# Altium PCB 驱动1.PcbDoc (part 1 of 2)
Units mil, origin at the board's own origin, x right, y up, seen from the top; angles counter-clockwise.
Board outline 2623.25 x 1935.03 mil, 2 copper layers (Top Layer, Bottom Layer); 38 components, 27 nets, 123 pads, 99 vias.
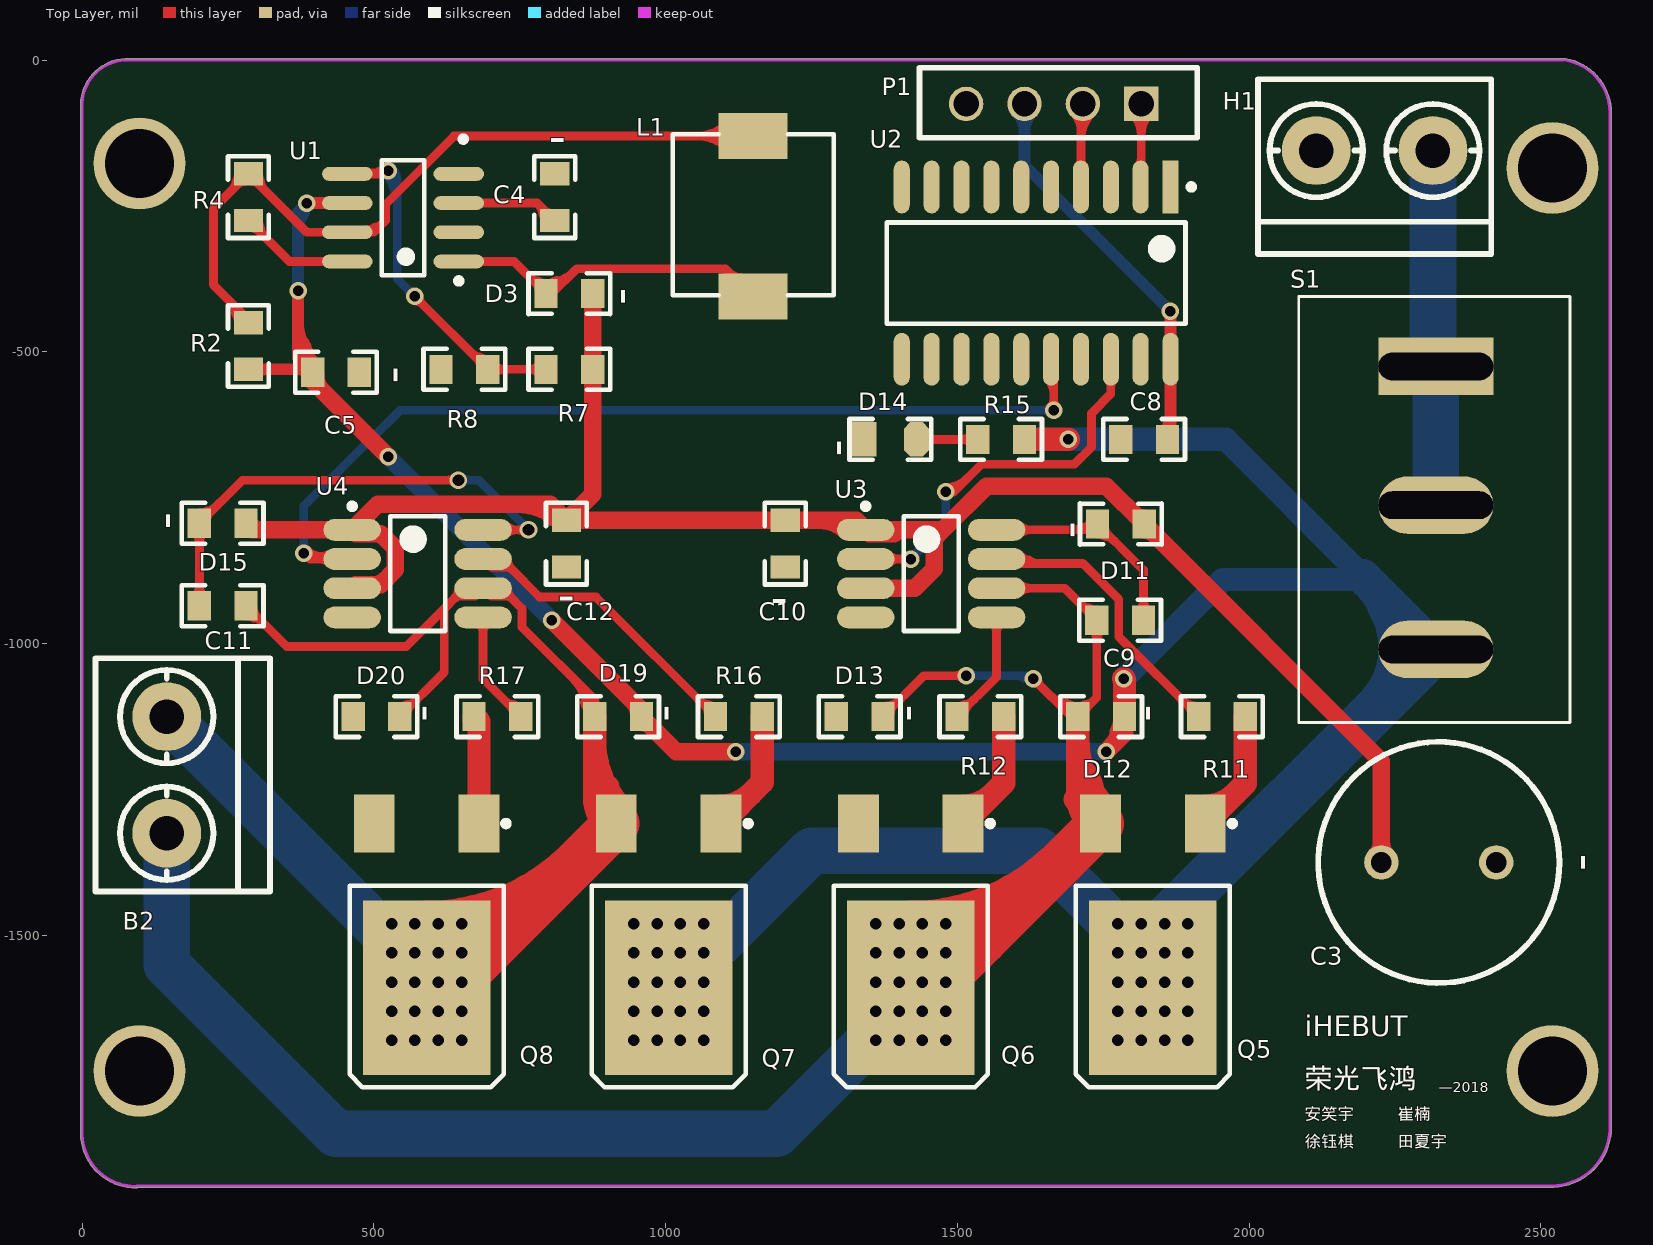
[diagram p0: Top Layer view]
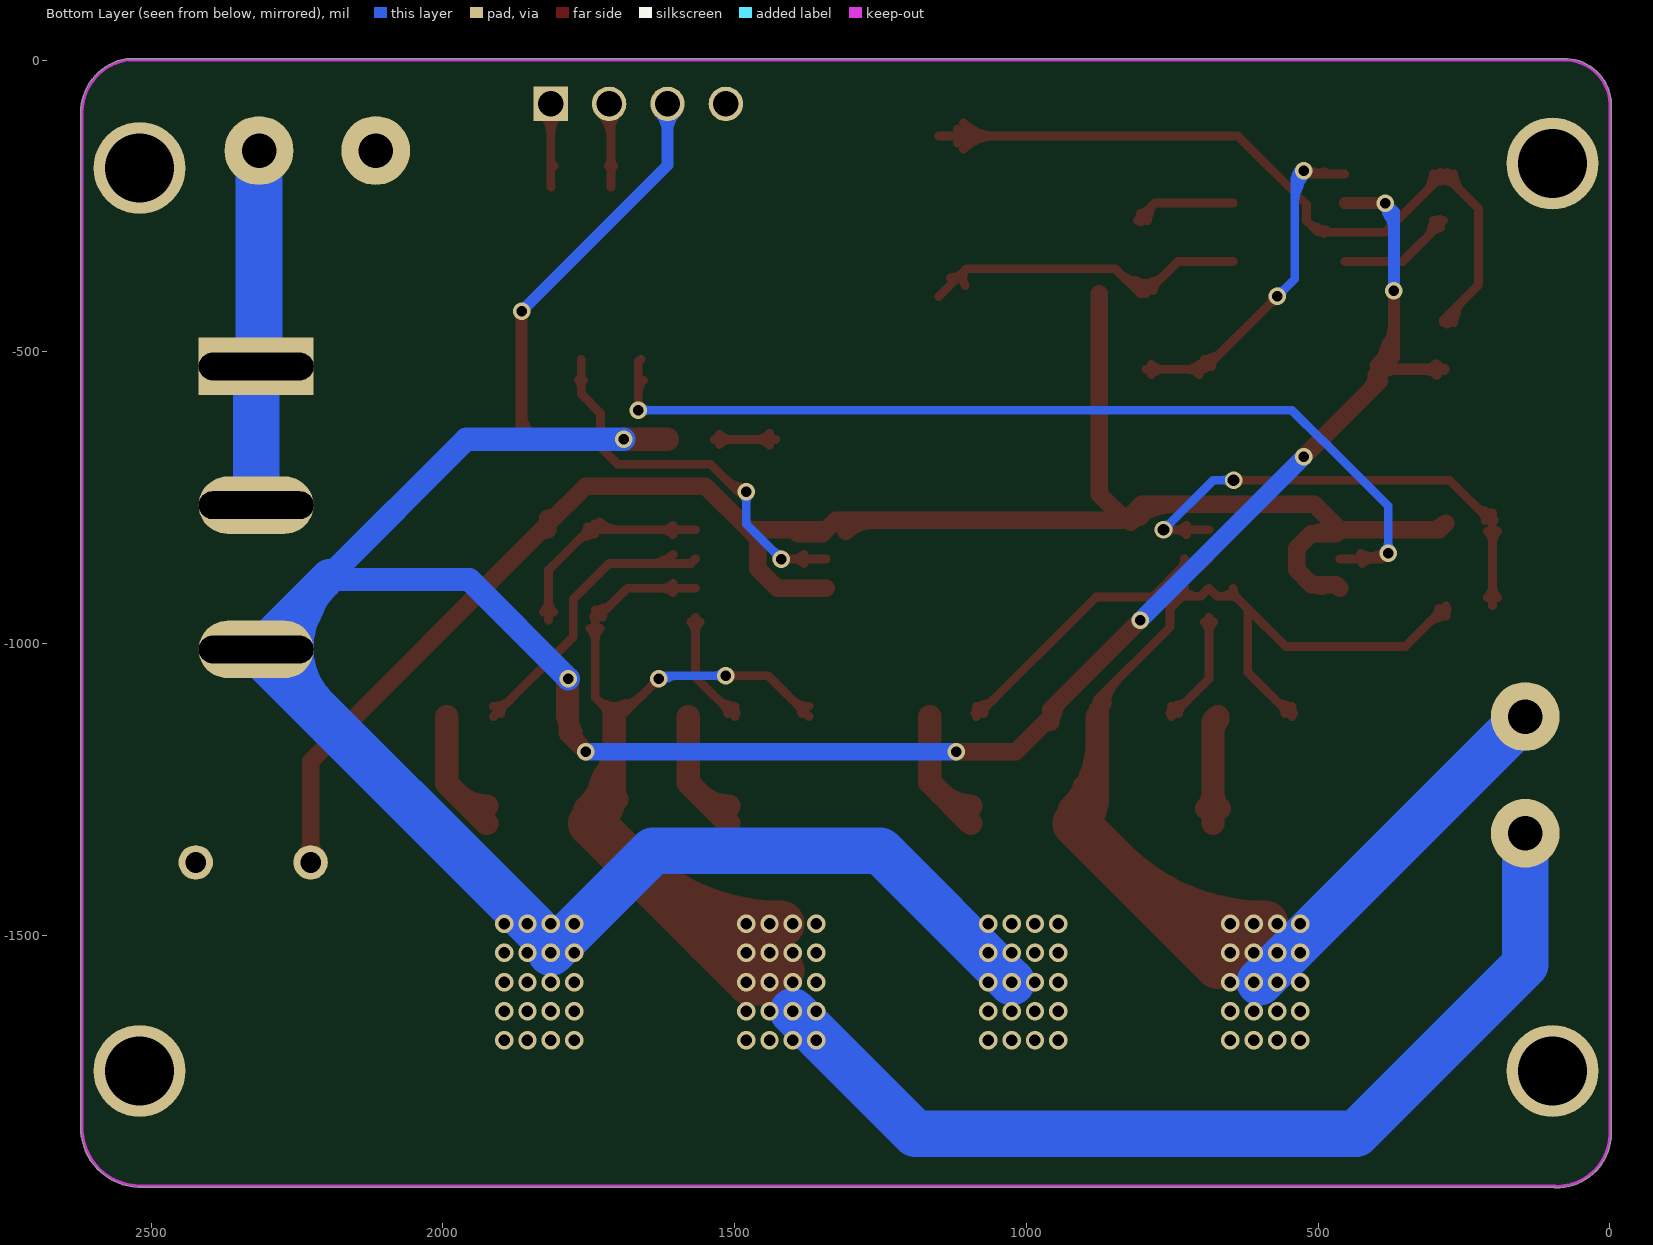
[diagram p1: Bottom Layer view, seen from below]

## Layer stack, top to bottom
Top Layer: signal copper 1.4
Dielectric: dielectric 12.6, FR-4, Dk 4.8
Bottom Layer: signal copper 1.4

## Board outline
-2.51,-1840.05 cw(c0,-1840) -2.51,-1840 -2.51,-75 cw(c0,-75) -2.51,-74.92 cw(c77.5,-77.5) 80.04,2.52 cw(c77.5,-77.5) 80.08,2.51 80,2.52 2538.9,2.52 cw(c2538.9,0) 2540.35,2.06 cw(c2541.77,-0.02) 2542.18,2.46 cw(c2526.77,-90.02) 2620.32,-83.8 cw(c2618.11,-85) 2620.63,-85 2620.63,-1824.08 cw(c2517.72,-1828.74) 2620.73,-1828.74 cw(c2517.72,-1828.74) 2522.44,-1931.65 cw(c2522.32,-1929.13) 2522.28,-1931.65 95.21,-1931.65 cw(c93.31,-1930) 93.35,-1932.51 cw(c91.65,-1838.35)

## Design rules (kind name [scope] priority, off if disabled: settings)
Clearance [All] p1: gap=10
PolygonConnect [All] p1: connectstyle=Relief reliefconductorwidth=10 reliefentries=4 polygonreliefangle="90 Angle" airgapwidth=10
RoutingVias [All] p1: holewidth=15 width=30 viastyle="Through Hole" minholewidth=15 minwidth=30 maxholewidth=200 maxwidth=200
SMDNeckDown [All] p1: percent=80.000
SolderMaskExpansion [All] p1: expansion=4
Width [All] p1: maxlimit=100 minlimit=1 preferedwidth=15
28 further rules are at their usual default settings.

## Components (designator, comment, footprint, x,y, rotation, side; value= is the part's Value field where it differs from the comment)
B2 "Motor" KF301-2P 145,-1225 r0 top
C3 "Cap Pol1" RB5-10.5 2325,-1375 r0 top
C4 "Cap Pol1" 0805(2012) 810,-235 r90 top
C5 "Cap Pol1" 0805(2012) 435,-535 r0 top
C8 "Cap" 0805(2012) 1820,-650 r0 top
C9 "Cap" 0805(2012) 1779.01,-960 r180 top
C10 "Cap Pol1" 0805(2012) 1205,-828.8 r270 top
C11 "Cap" 0805(2012) 240.99,-935 r0 top
C12 "Cap Pol1" 0805(2012) 830,-828.8 r270 top
D3 "1N5819" 0805(2012) 835,-400 r180 top
D11 "1N5819" 0805(2012) 1780,-795 r0 top
D12 "1N5819" 0805(2012) 1746.39,-1125 r180 top
D13 "1N5819" 0805(2012) 1332.47,-1125 r180 top
D14 "RED" 0805 1385,-650 r180 top
D15 "1N5819" 0805(2012) 240.99,-793.8 r0 top
D19 "1N5819" 0805(2012) 918.55,-1125 r180 top
D20 "1N5819" 0805(2012) 504.63,-1125 r180 top
H1 "POWER IN" KF301-2P 2215,-155 r270 top
L1 "Inductor" 电感8*8 1150,-265 r270 top
P1 "PWM" PIN-4 1815,-80 r180 top
Q5 "IR7843" LR7843 1835,-1450 r90 top
Q6 "IR7843" LR7843 1420.13,-1450 r90 top
Q7 "IR7843" LR7843 1005.25,-1450 r90 top
Q8 "IR7843" LR7843 590.37,-1450 r90 top
R2 "Res2" 0805(2012) 285,-490 r270 top
R4 "Res2" 0805(2012) 285,-235 r90 top
R7 "Res2" 0805(2012) 835,-530 r180 top
R8 "Res2" 0805(2012) 655,-530 r0 top
R11 "Res2" 0805(2012) 1953.34,-1125 r0 top
R12 "Res2" 0805(2012) 1539.43,-1125 r0 top
R15 "Res2" 0805(2012) 1575,-650 r180 top
R16 "Res2" 0805(2012) 1125.51,-1125 r0 top
R17 "Res2" 0805(2012) 711.59,-1125 r180 top
S1 "sp" SWICH-3 2575,-950 r90 top
U1 "MC34063" MC34063 555,-270 r180 top
U2 "74ls244" 74LS244 1635,-365 r270 top
U3 "IR2104  S" IR2104S 1455,-880 r0 top
U4 "IR2104  S" IR2104S 575,-880 r0 top

## Footprints (in the part's own frame and the unit in brackets; to place one, negate y for a bottom-side part, rotate by r counter-clockwise, add the part's x,y. Pads: shape width x height; smd on the part's side, far side on the other; paste and mask are expansions set on the pad)
74LS244 [mm]
  rect 2.3x0.7 smd: 1(-3.75,5.85)
  oval 2.3x0.7 smd: 2(-3.75,4.55) 3(-3.75,3.25) 4(-3.75,1.95) 5(-3.75,0.65) 6(-3.75,-0.65) 7(-3.75,-1.95) 8(-3.75,-3.25) 9(-3.75,-4.55) 10(-3.75,-5.85) 11(3.75,-5.85) 12(3.75,-4.55) 13(3.75,-3.25) 14(3.75,-1.95) 15(3.75,-0.65) 16(3.75,0.65) 17(3.75,1.95) 18(3.75,3.25) 19(3.75,4.55) 20(3.75,5.85)
  silkscreen extent -3.87,-6.5 2.2,6.88
0805 [mm]
  oct 1.1x1.5 smd: 1(-1.143,0)
  rect 1.1x1.5 smd: 2(1.143,0)
  silkscreen extent -1.78,-0.89 1.78,0.89
0805(2012) [mil]
  rect 40x50 smd: 1(-40,0) 2(40,0)
  silkscreen extent -70,-35 70,35
IR2104S [mm] "SOIC, 8-Leads, Body 4.90x4.16mm, Pitch 1.27mm, IPC Medium Density"
  oval 2.5x0.95 smd: 1(-2.85,1.905) 2(-2.85,0.635) 3(-2.85,-0.635) 4(-2.85,-1.905) 5(2.85,-1.905) 6(2.85,-0.635) 7(2.85,0.635) 8(2.85,1.905)
  silkscreen extent -2.97,-2.5 1.2,3.05, body extent -2.1,-2.5 2.1,2.5, height 1.75
KF301-2P [mm]
  round 3 hole 1.5: 1(0,-2.54) 2(0,2.54)
  silkscreen extent -3.1,-5.08 4.5,5.08
LR7843 [mm]
  rect 2.54x1.778 smd: 1(3.6,-2.28) 3(3.6,2.28)
  rect 7.6x5.55 smd: 2(-3.556,0)
  silkscreen extent -7.87,-3.58 3.72,3.35
MC34063 [mm]
  oval 2.2x0.6 smd: 1(-2.298,1.905) 2(-2.298,0.635) 3(-2.298,-0.635) 4(-2.298,-1.905) 5(2.552,-1.905) 6(2.552,-0.635) 7(2.552,0.635) 8(2.552,1.905)
  silkscreen extent -2.62,-3.54 1.05,2.88, body extent -1.87,-2.5 2.13,2.5, height 1.5
PIN-4 [mm]
  rect 1.5x1.5 hole 1.1: 1(0,-0.127)
  round 1.5 hole 1.1: 2(2.54,-0.127) 3(5.08,-0.127) 4(7.62,-0.127)
  silkscreen extent -2.44,-1.7 9.65,1.35
RB5-10.5 [mm] "Capacitor (Radial); 2 Leads"
  round 1.5 hole 0.9: 1(-2.5,0) 2(2.5,0)
  silkscreen extent -5.25,-5.25 5.25,5.25
SWICH-3 [mm]
  rect 2.5x5 hole 1.2 slot 5 at 90 deg: 1(10.795,6.477)
  oval 2.5x5 hole 1.2 slot 5 at 90 deg: 2(4.756,6.477) 3(-1.524,6.477)
  silkscreen extent -4.7,0.63 13.84,12.45
电感8*8 [mm]
  rect 2x3 smd: 1(-3.429,0) 2(3.556,0)
  silkscreen extent -3.5,-3.5 3.5,3.5

## Part data
B2: library part "Motor Servo", "Servo Motor"
C3 C4 C5 C10 C12: "Polarized Capacitor (Radial)"
C8 C9 C11: "Capacitor"
D3 D11 D12 D13 D15 D19 D20: library part 1N4148, "Silicon Epitaxial Planar Diode for Various Detector, Modulator, Demodulator"
D14: library part LED2, "Typical RED, GREEN, YELLOW, AMBER GaAs LED"
P1: library part 4-SPI
Q5 Q6 Q7 Q8: "N-Channel Power MOSFET"
R2 R4 R7 R8 R11 R12 R15 R16 R17: "Resistor"
U1: library part Component_1

## Free pads (board coordinates)
  round 157.48 hole 118.11: 1(98.43,-177.17) 2(2519.69,-185) 3(98.43,-1732.28) 4(2519.69,-1732.28)

## Via types
v1: diameter 31.5, hole 19.68, Top Layer to Bottom Layer, 80 vias
v2: diameter 30, hole 18, Top Layer to Bottom Layer, 17 vias
v3: diameter 30, hole 20, Top Layer to Bottom Layer, 2 vias

## Nets (pads, with @x,y where several pads share a name; then routed paths per layer and width w, separated by ;. In a path a pad name is that pad's centre, name@x,y a point inside that pad or via, vN(x,y) a via of type N, cw(c..) or ccw(c..) an arc to the next point about the centre after c; other vN are vias at no path point)
5V: C8.2 P1.3 U2.20 | length 1102.3
  Top Layer w20: C8.2@1860,-650 1865.32,-644.68 U2.20@1865.32,-512.64 1865.32,-430.32 v2(1865,-430) ; C8.2@1852.93,-637.93 ccw(c1823.03,-608.03) 1865.32,-608.03 ; C8.2@1852.93,-637.93 ccw(c1823.03,-608.03) 1865.32,-608.03 ; C8.2@1852.93,-637.93 ccw(c1823.03,-608.03) 1865.32,-608.03 ; C8.2@1852.93,-637.93 ccw(c1823.03,-608.03) 1865.32,-608.03 ; C8.2@1852.93,-637.93 ccw(c1823.03,-608.03) 1865.32,-608.03 ; C8.2@1852.93,-637.93 ccw(c1823.03,-608.03) 1865.32,-608.03
  Bottom Layer w20: P1.3@1615,-75 1615,-180 v2(1865,-430) ; P1.3@1601.19,-88.81 cw(c1567.86,-122.14) 1615,-122.14 ; P1.3@1601.19,-88.81 cw(c1567.86,-122.14) 1615,-122.14 ; P1.3@1601.19,-88.81 cw(c1567.86,-122.14) 1615,-122.14 ; 1615,-122.14 cw(c1662.14,-122.14) P1.3@1628.81,-88.81 ; 1615,-122.14 cw(c1662.14,-122.14) P1.3@1628.81,-88.81 ; 1615,-122.14 cw(c1662.14,-122.14) P1.3@1628.81,-88.81
12V: C3.1 C10.1 C12.1 D3.1 D11.2 D15.2 R7.1 U3.1 U3.3 U4.1 U4.3 | length 4484.4
  Top Layer w30: D15.2@280.99,-793.8 292.19,-805 U4.1@462.8,-805 ; U4.3@462.8,-905 469.1,-898.7 511.41,-898.7 537.01,-873.1 537.01,-836.9 511.41,-811.3 469.1,-811.3 U4.1@462.8,-805 ; D3.1@875,-400 R7.1@875,-530 875,-743.8 C12.1@830,-788.8 ; U3.3@1342.8,-905 1426.57,-905 1460,-871.57 1460,-819.89 1474.89,-805 ; 1391.41,-811.3 1349.1,-811.3 U3.1@1342.8,-805 ; C3.1@2226.57,-1375 2226.57,-1201.57 D11.2@1820,-795 1820,-794.65 1755.35,-730 1549.89,-730 1474.89,-805 ; D15.2@284.53,-795.27 ccw(c308.02,-771.77) 308.02,-805 ; D15.2@284.53,-795.27 ccw(c308.02,-771.77) 308.02,-805 ; D15.2@284.53,-795.27 ccw(c308.02,-771.77) 308.02,-805 ; U4.1@462.8,-805 506.5,-761.3 802.5,-761.3 C12.1@830,-788.8 ; U4.3@493.31,-901.3 ccw(c493.31,-863.87) 519.77,-890.34 ; U4.3@493.31,-901.3 ccw(c493.31,-863.87) 519.77,-890.34 ; U4.3@493.31,-901.3 ccw(c493.31,-863.87) 519.77,-890.34 ; U4.1@493.31,-808.7 cw(c493.31,-846.13) 519.77,-819.66 ; U4.1@493.31,-808.7 cw(c493.31,-846.13) 519.77,-819.66 ; U4.1@493.31,-808.7 cw(c493.31,-846.13) 519.77,-819.66 ; U4.1@493.31,-808.7 cw(c493.31,-846.13) 519.77,-819.66 ; U4.1@493.31,-808.7 cw(c493.31,-846.13) 519.77,-819.66 ; U4.1@493.31,-808.7 cw(c493.31,-846.13) 519.77,-819.66 ; 746.53,-761.3 cw(c746.53,-867.27) C12.1@821.46,-792.34 ; 746.53,-761.3 cw(c746.53,-867.27) C12.1@821.46,-792.34 ; 746.53,-761.3 cw(c746.53,-867.27) C12.1@821.46,-792.34 ; 802.03,-781.12 ccw(c816.31,-756.39) C12.1@823.71,-783.97 ; 802.03,-781.12 ccw(c816.31,-756.39) C12.1@823.71,-783.97 ; 802.03,-781.12 ccw(c816.31,-756.39) C12.1@823.71,-783.97 ; 802.03,-781.12 ccw(c816.31,-756.39) C12.1@823.71,-783.97 ; C12.1@812.93,-771.73 cw(c795.86,-788.8) C12.1@820,-788.8 ; C12.1@812.93,-771.73 cw(c795.86,-788.8) C12.1@820,-788.8 ; C12.1@812.93,-771.73 cw(c795.86,-788.8) C12.1@820,-788.8 ; C12.1@830,-788.8 C10.1@1205,-788.8 1326.6,-788.8 U3.1@1342.8,-805 ; C12.1@840,-788.8 cw(c864.14,-788.8) C12.1@847.07,-771.73 ; C12.1@840,-788.8 cw(c864.14,-788.8) C12.1@847.07,-771.73 ; C12.1@840,-788.8 cw(c864.14,-788.8) C12.1@847.07,-771.73 ; 1264.25,-788.8 cw(c1264.25,-853.04) U3.1@1309.67,-807.62 ; 1264.25,-788.8 cw(c1264.25,-853.04) U3.1@1309.67,-807.62 ; 1264.25,-788.8 cw(c1264.25,-853.04) U3.1@1309.67,-807.62 ; U3.1@1342.8,-805 1474.89,-805 ; D11.2@1803.54,-778.18 ccw(c1820,-761.72) D11.2@1820,-785 ; D11.2@1803.54,-778.18 ccw(c1820,-761.72) D11.2@1820,-785 ; D11.2@1803.54,-778.18 ccw(c1820,-761.72) D11.2@1820,-785 ; D11.2@1820,-805 cw(c1820,-829.14) D11.2@1837.07,-812.07 ; D11.2@1820,-805 cw(c1820,-829.14) D11.2@1837.07,-812.07 ; D11.2@1820,-805 cw(c1820,-829.14) D11.2@1837.07,-812.07 ; C3.1@2216.3,-1364.73 ccw(c2191.5,-1339.93) 2226.57,-1339.93 ; C3.1@2216.3,-1364.73 ccw(c2191.5,-1339.93) 2226.57,-1339.93 ; C3.1@2216.3,-1364.73 ccw(c2191.5,-1339.93) 2226.57,-1339.93 ; 2226.57,-1339.93 ccw(c2261.65,-1339.93) C3.1@2236.85,-1364.73 ; 2226.57,-1339.93 ccw(c2261.65,-1339.93) C3.1@2236.85,-1364.73 ; 2226.57,-1339.93 ccw(c2261.65,-1339.93) C3.1@2236.85,-1364.73
GND: C3.2 C4.2 C5.2 C8.1 C10.2 C12.2 D13.2 D14.2 D20.2 H1.1 P1.4 Q6.3 Q8.3 R8.1 U1.2 U1.4 U2.1 U2.3 U2.5 U2.6 U2.7 U2.8 U2.9 U2.10 U2.11 U2.12 U2.13 U2.14 U2.15 U2.17 U2.19 U3.4 U4.4
"MOTOR1 IN1": U2.18 U3.2 | length 1745
  Top Layer w15: U3.2@1342.8,-855 v2(1420,-855) ; v2(1480,-740) 1493.93,-740 1541.43,-692.5 1700.53,-692.5 1730,-663.03 1730,-605 1762.95,-572.05 U2.18@1762.95,-512.64 ; U3.2@1381.23,-862.92 cw(c1400.35,-882.04) 1400.35,-855 ; U3.2@1381.23,-862.92 cw(c1400.35,-882.04) 1400.35,-855 ; U3.2@1381.23,-862.92 cw(c1400.35,-882.04) 1400.35,-855 ; U3.2@1381.23,-862.92 cw(c1400.35,-882.04) 1400.35,-855 ; U3.2@1381.23,-862.92 cw(c1400.35,-882.04) 1400.35,-855 ; U3.2@1381.23,-862.92 cw(c1400.35,-882.04) 1400.35,-855 ; U3.2@1381.23,-847.08 ccw(c1400.35,-827.96) 1400.35,-855 ; U3.2@1381.23,-847.08 ccw(c1400.35,-827.96) 1400.35,-855 ; U3.2@1381.23,-847.08 ccw(c1400.35,-827.96) 1400.35,-855 ; U3.2@1381.23,-847.08 ccw(c1400.35,-827.96) 1400.35,-855 ; U3.2@1381.23,-847.08 ccw(c1400.35,-827.96) 1400.35,-855 ; U3.2@1381.23,-847.08 ccw(c1400.35,-827.96) 1400.35,-855 ; 1401.89,-855 cw(c1401.89,-873.11) v2@1414.7,-860.3 ; 1401.89,-855 ccw(c1401.89,-836.89) v2@1414.7,-849.7 ; 1401.89,-855 cw(c1401.89,-873.11) v2@1414.7,-860.3 ; 1401.89,-855 ccw(c1401.89,-836.89) v2@1414.7,-849.7 ; 1401.89,-855 cw(c1401.89,-873.11) v2@1414.7,-860.3 ; 1401.89,-855 ccw(c1401.89,-836.89) v2@1414.7,-849.7 ; 1401.89,-855 cw(c1401.89,-873.11) v2@1414.7,-860.3 ; 1401.89,-855 ccw(c1401.89,-836.89) v2@1414.7,-849.7 ; 1401.89,-855 cw(c1401.89,-873.11) v2@1414.7,-860.3 ; 1401.89,-855 ccw(c1401.89,-836.89) v2@1414.7,-849.7 ; 1401.89,-855 cw(c1401.89,-873.11) v2@1414.7,-860.3 ; 1401.89,-855 ccw(c1401.89,-836.89) v2@1414.7,-849.7 ; v2@1480,-732.5 ccw(c1480,-680.77) 1516.58,-717.35 ; v2@1480,-732.5 ccw(c1480,-680.77) 1516.58,-717.35 ; v2@1480,-732.5 ccw(c1480,-680.77) 1516.58,-717.35 ; v2@1480,-732.5 ccw(c1480,-680.77) 1516.58,-717.35 ; v2@1480,-732.5 ccw(c1480,-680.77) 1516.58,-717.35 ; v2@1480,-732.5 ccw(c1480,-680.77) 1516.58,-717.35 ; U2.18@1758.51,-548.57 cw(c1747.79,-559.29) 1762.95,-559.29 ; U2.18@1758.51,-548.57 cw(c1747.79,-559.29) 1762.95,-559.29 ; U2.18@1758.51,-548.57 cw(c1747.79,-559.29) 1762.95,-559.29 ; 1762.95,-559.29 cw(c1778.11,-559.29) U2.18@1767.39,-548.57 ; 1762.95,-559.29 cw(c1778.11,-559.29) U2.18@1767.39,-548.57 ; 1762.95,-559.29 cw(c1778.11,-559.29) U2.18@1767.39,-548.57
  Bottom Layer w15: v2(1420,-855) 1480,-795 v2(1480,-740) ; v2@1420,-847.5 ccw(c1420,-829.39) 1432.8,-842.2 ; v2@1420,-847.5 ccw(c1420,-829.39) 1432.8,-842.2 ; v2@1420,-847.5 ccw(c1420,-829.39) 1432.8,-842.2 ; v2@1420,-847.5 ccw(c1420,-829.39) 1432.8,-842.2 ; v2@1420,-847.5 ccw(c1420,-829.39) 1432.8,-842.2 ; v2@1420,-847.5 ccw(c1420,-829.39) 1432.8,-842.2 ; v2@1427.5,-855 cw(c1445.61,-855) 1432.8,-842.2 ; v2@1427.5,-855 cw(c1445.61,-855) 1432.8,-842.2 ; v2@1427.5,-855 cw(c1445.61,-855) 1432.8,-842.2 ; v2@1427.5,-855 cw(c1445.61,-855) 1432.8,-842.2 ; v2@1427.5,-855 cw(c1445.61,-855) 1432.8,-842.2 ; v2@1427.5,-855 cw(c1445.61,-855) 1432.8,-842.2 ; v2@1474.7,-745.3 cw(c1461.89,-758.11) 1480,-758.11 ; v2@1474.7,-745.3 cw(c1461.89,-758.11) 1480,-758.11 ; v2@1474.7,-745.3 cw(c1461.89,-758.11) 1480,-758.11 ; v2@1474.7,-745.3 cw(c1461.89,-758.11) 1480,-758.11 ; v2@1474.7,-745.3 cw(c1461.89,-758.11) 1480,-758.11 ; v2@1474.7,-745.3 cw(c1461.89,-758.11) 1480,-758.11 ; 1480,-758.11 cw(c1498.11,-758.11) v2@1485.3,-745.3 ; 1480,-758.11 cw(c1498.11,-758.11) v2@1485.3,-745.3 ; 1480,-758.11 cw(c1498.11,-758.11) v2@1485.3,-745.3 ; 1480,-758.11 cw(c1498.11,-758.11) v2@1485.3,-745.3 ; 1480,-758.11 cw(c1498.11,-758.11) v2@1485.3,-745.3 ; 1480,-758.11 cw(c1498.11,-758.11) v2@1485.3,-745.3
"MOTOR1 IN2": U2.16 U4.2 | length 2441.7
  Top Layer w15: v2(380,-845) 390,-855 U4.2@462.8,-855 ; U2.16@1660.59,-512.64 1665,-517.05 v2(1665,-600) ; v2@383.91,-851.4 cw(c394.74,-869.08) 405.1,-851.13 ; v2@383.91,-851.4 cw(c394.74,-869.08) 405.1,-851.13 ; v2@383.91,-851.4 cw(c394.74,-869.08) 405.1,-851.13 ; v2@383.91,-851.4 cw(c394.74,-869.08) 405.1,-851.13 ; v2@385.3,-839.7 ccw(c422.25,-802.75) U4.2@422.25,-855 ; v2@385.3,-839.7 ccw(c422.25,-802.75) U4.2@422.25,-855 ; v2@385.3,-839.7 ccw(c422.25,-802.75) U4.2@422.25,-855 ; 400.47,-849.16 ccw(c409.11,-816.94) U4.2@426.46,-845.43 ; 400.47,-849.16 ccw(c409.11,-816.94) U4.2@426.46,-845.43 ; 400.47,-849.16 ccw(c409.11,-816.94) U4.2@426.46,-845.43 ; 400.47,-849.16 ccw(c409.11,-816.94) U4.2@426.46,-845.43 ; 405.24,-855 cw(c405.24,-882.04) U4.2@424.36,-862.92 ; 405.24,-855 ccw(c405.24,-827.96) U4.2@424.36,-847.08 ; 405.24,-855 cw(c405.24,-882.04) U4.2@424.36,-862.92 ; 405.24,-855 ccw(c405.24,-827.96) U4.2@424.36,-847.08 ; 405.24,-855 cw(c405.24,-882.04) U4.2@424.36,-862.92 ; 405.24,-855 ccw(c405.24,-827.96) U4.2@424.36,-847.08 ; 411.55,-852.13 cw(c406.85,-869.69) U4.2@422.58,-860.6 ; 411.55,-852.13 cw(c406.85,-869.69) U4.2@422.58,-860.6 ; 411.55,-852.13 cw(c406.85,-869.69) U4.2@422.58,-860.6 ; 411.55,-852.13 cw(c406.85,-869.69) U4.2@422.58,-860.6 ; U2.16@1656.15,-548.57 cw(c1634.79,-569.94) 1665,-569.94 ; U2.16@1656.15,-548.57 cw(c1634.79,-569.94) 1665,-569.94 ; U2.16@1656.15,-548.57 cw(c1634.79,-569.94) 1665,-569.94 ; v2@1659.7,-594.7 ccw(c1646.89,-581.89) 1665,-581.89 ; v2@1659.7,-594.7 ccw(c1646.89,-581.89) 1665,-581.89 ; v2@1659.7,-594.7 ccw(c1646.89,-581.89) 1665,-581.89 ; 1665,-581.89 ccw(c1683.11,-581.89) v2@1670.3,-594.7 ; 1665,-581.89 ccw(c1683.11,-581.89) v2@1670.3,-594.7 ; 1665,-581.89 ccw(c1683.11,-581.89) v2@1670.3,-594.7
  Bottom Layer w15: v2(380,-845) 380,-764.04 491.54,-652.5 492.5,-652.5 545,-600 v2(1665,-600) ; v2@374.7,-839.7 ccw(c361.89,-826.89) 380,-826.89 ; v2@374.7,-839.7 ccw(c361.89,-826.89) 380,-826.89 ; v2@374.7,-839.7 ccw(c361.89,-826.89) 380,-826.89 ; 380,-826.89 ccw(c398.11,-826.89) v2@385.3,-839.7 ; 380,-826.89 ccw(c398.11,-826.89) v2@385.3,-839.7 ; 380,-826.89 ccw(c398.11,-826.89) v2@385.3,-839.7 ; 1646.89,-600 cw(c1646.89,-618.11) v2@1659.7,-605.3 ; 1646.89,-600 ccw(c1646.89,-581.89) v2@1659.7,-594.7 ; 1646.89,-600 cw(c1646.89,-618.11) v2@1659.7,-605.3 ; 1646.89,-600 ccw(c1646.89,-581.89) v2@1659.7,-594.7 ; 1646.89,-600 cw(c1646.89,-618.11) v2@1659.7,-605.3 ; 1646.89,-600 ccw(c1646.89,-581.89) v2@1659.7,-594.7
NetB2_1: B2.1 C9.2 D12.2 D13.1 Q5.3 Q6.2 U3.6 | length 10298.3
  Top Layer w15: D13.1@1372.47,-1125 1442.47,-1055 v2(1515,-1055) ; U3.6@1567.2,-905 1684.01,-905 C9.2@1739.01,-960 1739.01,-1092.38 D12.2@1706.39,-1125 1695,-1125 v2(1630,-1060) ; D13.1@1372.47,-1107.5 ccw(c1372.47,-1065.25) 1402.34,-1095.13 ; D13.1@1372.47,-1107.5 ccw(c1372.47,-1065.25) 1402.34,-1095.13 ; D13.1@1372.47,-1107.5 ccw(c1372.47,-1065.25) 1402.34,-1095.13 ; D13.1@1384.97,-1120 cw(c1403.07,-1120) D13.1@1390.27,-1107.2 ; D13.1@1384.97,-1120 cw(c1403.07,-1120) D13.1@1390.27,-1107.2 ; D13.1@1384.97,-1120 cw(c1403.07,-1120) D13.1@1390.27,-1107.2 ; 1496.89,-1055 cw(c1496.89,-1073.11) v2@1509.7,-1060.3 ; 1496.89,-1055 ccw(c1496.89,-1036.89) v2@1509.7,-1049.7 ; 1496.89,-1055 cw(c1496.89,-1073.11) v2@1509.7,-1060.3 ; 1496.89,-1055 ccw(c1496.89,-1036.89) v2@1509.7,-1049.7 ; 1496.89,-1055 cw(c1496.89,-1073.11) v2@1509.7,-1060.3 ; 1496.89,-1055 ccw(c1496.89,-1036.89) v2@1509.7,-1049.7 ; U3.6@1605.64,-912.92 cw(c1624.76,-932.04) 1624.76,-905 ; U3.6@1605.64,-912.92 cw(c1624.76,-932.04) 1624.76,-905 ; U3.6@1605.64,-912.92 cw(c1624.76,-932.04) 1624.76,-905 ; U3.6@1605.64,-897.08 ccw(c1624.76,-877.96) 1624.76,-905 ; U3.6@1605.64,-897.08 ccw(c1624.76,-877.96) 1624.76,-905 ; U3.6@1605.64,-897.08 ccw(c1624.76,-877.96) 1624.76,-905 ; v2@1630,-1067.5 cw(c1630,-1085.61) 1642.8,-1072.8 ; v2@1630,-1067.5 cw(c1630,-1085.61) 1642.8,-1072.8 ; v2@1630,-1067.5 cw(c1630,-1085.61) 1642.8,-1072.8 ; v2@1637.5,-1060 ccw(c1655.61,-1060) 1642.8,-1072.8 ; v2@1637.5,-1060 ccw(c1655.61,-1060) 1642.8,-1072.8 ; v2@1637.5,-1060 ccw(c1655.61,-1060) 1642.8,-1072.8 ; 1657.07,-1087.08 ccw(c1706.39,-1037.76) D12.2@1706.39,-1107.5 ; 1657.07,-1087.08 ccw(c1706.39,-1037.76) D12.2@1706.39,-1107.5 ; 1657.07,-1087.08 ccw(c1706.39,-1037.76) D12.2@1706.39,-1107.5 ; 1682.68,-1112.68 ccw(c1706.39,-1088.98) D12.2@1706.39,-1122.5 ; 1682.68,-1112.68 ccw(c1706.39,-1088.98) D12.2@1706.39,-1122.5 ; 1682.68,-1112.68 ccw(c1706.39,-1088.98) D12.2@1706.39,-1122.5 ; D12.2@1687.18,-1102.36 cw(c1678.08,-1136.34) D12.2@1708.55,-1118.75 ; D12.2@1687.18,-1102.36 cw(c1678.08,-1136.34) D12.2@1708.55,-1118.75 ; D12.2@1687.18,-1102.36 cw(c1678.08,-1136.34) D12.2@1708.55,-1118.75 ; D12.2@1687.18,-1102.36 cw(c1678.08,-1136.34) D12.2@1708.55,-1118.75 ; D12.2@1704.02,-1119.19 cw(c1726.81,-1126.95) D12.2@1720.58,-1103.7 ; D12.2@1704.02,-1119.19 cw(c1726.81,-1126.95) D12.2@1720.58,-1103.7 ; D12.2@1704.02,-1119.19 cw(c1726.81,-1126.95) D12.2@1720.58,-1103.7 ; D12.2@1704.02,-1119.19 cw(c1726.81,-1126.95) D12.2@1720.58,-1103.7 ; D12.2@1706.39,-1107.5 ccw(c1706.39,-1065.25) 1736.26,-1095.13 ; D12.2@1706.39,-1107.5 ccw(c1706.39,-1065.25) 1736.26,-1095.13 ; D12.2@1706.39,-1107.5 ccw(c1706.39,-1065.25) 1736.26,-1095.13 ; 1709.14,-930.13 ccw(c1739.01,-900.25) C9.2@1739.01,-942.5 ; 1709.14,-930.13 ccw(c1739.01,-900.25) C9.2@1739.01,-942.5 ; 1709.14,-930.13 ccw(c1739.01,-900.25) C9.2@1739.01,-942.5 ; D12.2@1718.89,-1120 cw(c1736.99,-1120) D12.2@1724.19,-1107.2 ; D12.2@1718.89,-1120 cw(c1736.99,-1120) D12.2@1724.19,-1107.2 ; D12.2@1718.89,-1120 cw(c1736.99,-1120) D12.2@1724.19,-1107.2 ; D12.2@1718.89,-1120 cw(c1736.99,-1120) D12.2@1724.19,-1107.2 ; C9.2@1721.21,-942.2 cw(c1708.4,-955) C9.2@1726.51,-955 ; C9.2@1721.21,-942.2 cw(c1708.4,-955) C9.2@1726.51,-955 ; C9.2@1721.21,-942.2 cw(c1708.4,-955) C9.2@1726.51,-955 ; C9.2@1724.82,-938.7 cw(c1718.59,-961.95) C9.2@1741.38,-954.19 ; C9.2@1724.82,-938.7 cw(c1718.59,-961.95) C9.2@1741.38,-954.19 ; C9.2@1724.82,-938.7 cw(c1718.59,-961.95) C9.2@1741.38,-954.19 ; C9.2@1724.82,-938.7 cw(c1718.59,-961.95) C9.2@1741.38,-954.19 ; C9.2@1730.17,-973.84 cw(c1708.83,-995.18) 1739.01,-995.18 ; C9.2@1730.17,-973.84 cw(c1708.83,-995.18) 1739.01,-995.18 ; C9.2@1730.17,-973.84 cw(c1708.83,-995.18) 1739.01,-995.18 ; 1739.01,-995.18 cw(c1769.19,-995.18) C9.2@1747.85,-973.84 ; 1739.01,-995.18 cw(c1769.19,-995.18) C9.2@1747.85,-973.84 ; 1739.01,-995.18 cw(c1769.19,-995.18) C9.2@1747.85,-973.84
  Top Layer w40: D12.2@1706.39,-1125 1706.39,-1269.42 ; Q5.3@1745.24,-1308.27 1706.39,-1269.42 ; 1701.88,-1266.47 ccw(c1728.13,-1251.31) Q5.3@1739.57,-1279.38 ; 1701.88,-1266.47 ccw(c1728.13,-1251.31) Q5.3@1739.57,-1279.38 ; 1701.88,-1266.47 ccw(c1728.13,-1251.31) Q5.3@1739.57,-1279.38 ; 1701.88,-1266.47 ccw(c1728.13,-1251.31) Q5.3@1739.57,-1279.38 ; 1701.88,-1266.47 ccw(c1728.13,-1251.31) Q5.3@1739.57,-1279.38 ; 1701.88,-1266.47 ccw(c1728.13,-1251.31) Q5.3@1739.57,-1279.38 ; 1701.88,-1266.47 ccw(c1728.13,-1251.31) Q5.3@1739.57,-1279.38 ; 1701.88,-1266.47 ccw(c1728.13,-1251.31) Q5.3@1739.57,-1279.38 ; 1701.88,-1266.47 ccw(c1728.13,-1251.31) Q5.3@1739.57,-1279.38 ; 1701.88,-1266.47 ccw(c1728.13,-1251.31) Q5.3@1739.57,-1279.38 ; 1701.88,-1266.47 ccw(c1728.13,-1251.31) Q5.3@1739.57,-1279.38 ; 1701.88,-1266.47 ccw(c1728.13,-1251.31) Q5.3@1739.57,-1279.38 ; 1701.88,-1266.47 ccw(c1728.13,-1251.31) Q5.3@1739.57,-1279.38 ; 1701.88,-1266.47 ccw(c1728.13,-1251.31) Q5.3@1739.57,-1279.38 ; 1701.88,-1266.47 ccw(c1728.13,-1251.31) Q5.3@1739.57,-1279.38 ; 1706.39,-1269.42 ccw(c1731.97,-1243.83) Q5.3@1741.35,-1278.78 ; 1706.39,-1269.42 ccw(c1731.97,-1243.83) Q5.3@1741.35,-1278.78 ; 1706.39,-1269.42 ccw(c1731.97,-1243.83) Q5.3@1741.35,-1278.78 ; 1706.39,-1269.42 ccw(c1731.97,-1243.83) Q5.3@1741.35,-1278.78 ; 1706.39,-1269.42 ccw(c1731.97,-1243.83) Q5.3@1741.35,-1278.78 ; 1706.39,-1269.42 ccw(c1731.97,-1243.83) Q5.3@1741.35,-1278.78 ; 1706.39,-1259.83 ccw(c1778.67,-1259.83) Q5.3@1727.56,-1310.95 ; 1706.39,-1259.83 ccw(c1778.67,-1259.83) Q5.3@1727.56,-1310.95 ; 1706.39,-1259.83 ccw(c1778.67,-1259.83) Q5.3@1727.56,-1310.95 ; 1706.39,-1259.83 ccw(c1778.67,-1259.83) Q5.3@1727.56,-1310.95 ; 1706.39,-1259.83 ccw(c1778.67,-1259.83) Q5.3@1727.56,-1310.95 ; 1706.39,-1259.83 ccw(c1778.67,-1259.83) Q5.3@1727.56,-1310.95 ; 1706.39,-1163.26 ccw(c1875.24,-1163.26) Q5.3@1755.84,-1282.66 ; 1706.39,-1163.26 ccw(c1875.24,-1163.26) Q5.3@1755.84,-1282.66 ; 1706.39,-1163.26 ccw(c1875.24,-1163.26) Q5.3@1755.84,-1282.66 ; 1706.39,-1163.26 ccw(c1875.24,-1163.26) Q5.3@1755.84,-1282.66 ; 1706.39,-1163.26 ccw(c1875.24,-1163.26) Q5.3@1755.84,-1282.66 ; 1706.39,-1163.26 ccw(c1875.24,-1163.26) Q5.3@1755.84,-1282.66 ; 1722.19,-1224.37 cw(c1647.99,-1267.21) Q5.3@1730.75,-1289.39 ; 1722.19,-1224.37 cw(c1647.99,-1267.21) Q5.3@1730.75,-1289.39 ; 1722.19,-1224.37 cw(c1647.99,-1267.21) Q5.3@1730.75,-1289.39 ; 1722.19,-1224.37 cw(c1647.99,-1267.21) Q5.3@1730.75,-1289.39 ; 1722.19,-1224.37 cw(c1647.99,-1267.21) Q5.3@1730.75,-1289.39 ; 1722.19,-1224.37 cw(c1647.99,-1267.21) Q5.3@1730.75,-1289.39 ; 1722.19,-1224.37 cw(c1647.99,-1267.21) Q5.3@1730.75,-1289.39 ; 1722.19,-1224.37 cw(c1647.99,-1267.21) Q5.3@1730.75,-1289.39 ; 1722.19,-1224.37 cw(c1647.99,-1267.21) Q5.3@1730.75,-1289.39 ; 1722.19,-1224.37 cw(c1647.99,-1267.21) Q5.3@1730.75,-1289.39 ; 1722.19,-1224.37 cw(c1647.99,-1267.21) Q5.3@1730.75,-1289.39 ; 1722.19,-1224.37 cw(c1647.99,-1267.21) Q5.3@1730.75,-1289.39 ; 1722.19,-1224.37 cw(c1647.99,-1267.21) Q5.3@1730.75,-1289.39 ; 1722.19,-1224.37 cw(c1647.99,-1267.21) Q5.3@1730.75,-1289.39 ; 1722.19,-1224.37 cw(c1647.99,-1267.21) Q5.3@1730.75,-1289.39 ; 1730.75,-1245.04 ccw(c1769.94,-1245.04) Q5.3@1752.07,-1279.92 ; 1730.75,-1245.04 ccw(c1769.94,-1245.04) Q5.3@1752.07,-1279.92 ; 1730.75,-1245.04 ccw(c1769.94,-1245.04) Q5.3@1752.07,-1279.92 ; 1730.75,-1245.04 ccw(c1769.94,-1245.04) Q5.3@1752.07,-1279.92 ; 1730.75,-1245.04 ccw(c1769.94,-1245.04) Q5.3@1752.07,-1279.92 ; 1730.75,-1245.04 ccw(c1769.94,-1245.04) Q5.3@1752.07,-1279.92 ; 1730.75,-1245.04 ccw(c1769.94,-1245.04) Q5.3@1752.07,-1279.92 ; 1730.75,-1245.04 ccw(c1769.94,-1245.04) Q5.3@1752.07,-1279.92 ; 1730.75,-1245.04 ccw(c1769.94,-1245.04) Q5.3@1752.07,-1279.92 ; 1730.75,-1245.04 ccw(c1769.94,-1245.04) Q5.3@1752.07,-1279.92 ; 1730.75,-1245.04 ccw(c1769.94,-1245.04) Q5.3@1752.07,-1279.92 ; 1730.75,-1245.04 ccw(c1769.94,-1245.04) Q5.3@1752.07,-1279.92 ; 1730.75,-1245.04 ccw(c1769.94,-1245.04) Q5.3@1752.07,-1279.92 ; 1730.75,-1245.04 ccw(c1769.94,-1245.04) Q5.3@1752.07,-1279.92 ; 1730.75,-1245.04 ccw(c1769.94,-1245.04) Q5.3@1752.07,-1279.92 ; 1730.75,-1245.04 ccw(c1769.94,-1245.04) Q5.3@1752.07,-1279.92 ; 1730.75,-1245.04 ccw(c1769.94,-1245.04) Q5.3@1752.07,-1279.92 ; 1730.75,-1245.04 ccw(c1769.94,-1245.04) Q5.3@1752.07,-1279.92 ; 1730.75,-1245.04 ccw(c1769.94,-1245.04) Q5.3@1752.07,-1279.92 ; 1730.75,-1245.04 ccw(c1769.94,-1245.04) Q5.3@1752.07,-1279.92
  Top Layer w80: v1(1440.13,-1580) 1473.5,-1580 Q5.3@1745.24,-1308.27 ; Q6.2@1420.13,-1560.39 ccw(c1420.13,-1384.19) 1544.72,-1508.79 ; Q6.2@1420.13,-1560.39 ccw(c1420.13,-1384.19) 1544.72,-1508.79 ; Q6.2@1420.13,-1560.39 ccw(c1420.13,-1384.19) 1544.72,-1508.79 ; Q6.2@1420.13,-1560.39 ccw(c1420.13,-1384.19) 1544.72,-1508.79 ; Q6.2@1420.13,-1560.39 ccw(c1420.13,-1384.19) 1544.72,-1508.79 ; Q6.2@1420.13,-1560.39 ccw(c1420.13,-1384.19) 1544.72,-1508.79 ; Q6.2@1420.13,-1480.39 ccw(c1420.13,-1111.05) 1681.29,-1372.22 ; Q6.2@1420.13,-1480.39 ccw(c1420.13,-1111.05) 1681.29,-1372.22 ; Q6.2@1420.13,-1480.39 ccw(c1420.13,-1111.05) 1681.29,-1372.22
  Bottom Layer w15: v2(1515,-1055) 1625,-1055 v2(1630,-1060) ; v2@1520.3,-1060.3 cw(c1533.11,-1073.11) 1533.11,-1055 ; v2@1520.3,-1060.3 cw(c1533.11,-1073.11) 1533.11,-1055 ; v2@1520.3,-1060.3 cw(c1533.11,-1073.11) 1533.11,-1055 ; v2@1520.3,-1049.7 ccw(c1533.11,-1036.89) 1533.11,-1055 ; v2@1520.3,-1049.7 ccw(c1533.11,-1036.89) 1533.11,-1055 ; v2@1520.3,-1049.7 ccw(c1533.11,-1036.89) 1533.11,-1055 ; 1599.82,-1055 cw(c1599.82,-1090.18) v2@1624.7,-1065.3 ; 1599.82,-1055 cw(c1599.82,-1090.18) v2@1624.7,-1065.3 ; 1599.82,-1055 cw(c1599.82,-1090.18) v2@1624.7,-1065.3 ; 1612.55,-1058.29 ccw(c1616.81,-1050.91) v2@1623.82,-1055.75 ; 1612.55,-1058.29 ccw(c1616.81,-1050.91) v2@1623.82,-1055.75 ; 1612.55,-1058.29 ccw(c1616.81,-1050.91) v2@1623.82,-1055.75 ; 1612.55,-1058.29 ccw(c1616.81,-1050.91) v2@1623.82,-1055.75
  Bottom Layer w80: B2.1@145,-1325 145,-1550 435,-1840 1190.13,-1840 v1(1400.13,-1630)
  other v1: 1360.13,-1680 1400.13,-1680 1440.13,-1680 1480.13,-1680 1360.13,-1630 1440.13,-1630 1480.13,-1630 1360.13,-1580 1400.13,-1580 1480.13,-1580 1360.13,-1530 1400.13,-1530 1440.13,-1530 1480.13,-1530 1360.13,-1480 1400.13,-1480 1440.13,-1480 1480.13,-1480
NetB2_2: B2.2 C11.2 D19.2 D20.1 Q7.3 Q8.2 U4.6 | length 5662
  Top Layer w15: C11.2@280.99,-935 350.99,-1005 555.5,-1005 620.49,-940.01 ; D20.1@544.63,-1125 620.49,-1049.14 620.49,-940.01 ; D19.2@878.55,-1125 878.55,-1096.35 ; C11.2@278.62,-940.81 ccw(c301.41,-933.05) C11.2@295.18,-956.3 ; C11.2@278.62,-940.81 ccw(c301.41,-933.05) C11.2@295.18,-956.3 ; C11.2@278.62,-940.81 ccw(c301.41,-933.05) C11.2@295.18,-956.3 ; C11.2@278.62,-940.81 ccw(c301.41,-933.05) C11.2@295.18,-956.3 ; C11.2@280.99,-952.5 cw(c280.99,-994.75) 310.86,-964.87 ; C11.2@280.99,-952.5 cw(c280.99,-994.75) 310.86,-964.87 ; C11.2@280.99,-952.5 cw(c280.99,-994.75) 310.86,-964.87 ; C11.2@293.49,-940 ccw(c311.6,-940) C11.2@298.79,-952.8 ; C11.2@293.49,-940 ccw(c311.6,-940) C11.2@298.79,-952.8 ; C11.2@293.49,-940 ccw(c311.6,-940) C11.2@298.79,-952.8 ; D20.1@542.27,-1119.19 cw(c565.06,-1126.95) D20.1@558.83,-1103.7 ; D20.1@542.27,-1119.19 cw(c565.06,-1126.95) D20.1@558.83,-1103.7 ; D20.1@542.27,-1119.19 cw(c565.06,-1126.95) D20.1@558.83,-1103.7 ; D20.1@542.27,-1119.19 cw(c565.06,-1126.95) D20.1@558.83,-1103.7 ; D20.1@544.63,-1107.5 ccw(c544.63,-1065.25) 574.51,-1095.13 ; D20.1@544.63,-1107.5 ccw(c544.63,-1065.25) 574.51,-1095.13 ; D20.1@544.63,-1107.5 ccw(c544.63,-1065.25) 574.51,-1095.13 ; D20.1@557.13,-1120 cw(c575.24,-1120) D20.1@562.44,-1107.2 ; D20.1@557.13,-1120 cw(c575.24,-1120) D20.1@562.44,-1107.2 ; D20.1@557.13,-1120 cw(c575.24,-1120) D20.1@562.44,-1107.2 ; 620.49,-940.01 641.7,-918.8 ; 635.53,-924.97 cw(c656.69,-946.13) U4.6@656.69,-916.2 ; 635.53,-924.97 cw(c656.69,-946.13) U4.6@656.69,-916.2 ; 635.53,-924.97 cw(c656.69,-946.13) U4.6@656.69,-916.2 ; 638.42,-922.08 ccw(c621.34,-905) U4.6@645.49,-905 ; 638.42,-922.08 ccw(c621.34,-905) U4.6@645.49,-905 ; 638.42,-922.08 ccw(c621.34,-905) U4.6@645.49,-905 ; 641.7,-918.8 cw(c650.2,-927.3) U4.6@653.56,-915.75 ; 641.7,-918.8 ccw(c631.8,-908.91) U4.6@645.63,-906.74 ; 641.7,-918.8 cw(c650.2,-927.3) U4.6@653.56,-915.75 ; 641.7,-918.8 ccw(c631.8,-908.91) U4.6@645.63,-906.74 ; 641.7,-918.8 cw(c650.2,-927.3) U4.6@653.56,-915.75 ; 641.7,-918.8 ccw(c631.8,-908.91) U4.6@645.63,-906.74 ; 641.7,-918.8 673.4,-918.8 U4.6@687.2,-905 701,-918.8 732.71,-918.8 ; U4.6@717.72,-916.2 cw(c717.72,-946.13) 738.88,-924.97 ; U4.6@717.72,-916.2 cw(c717.72,-946.13) 738.88,-924.97 ; U4.6@717.72,-916.2 cw(c717.72,-946.13) 738.88,-924.97 ; U4.6@720.85,-915.75 cw(c724.21,-927.3) 732.71,-918.8 ; U4.6@720.85,-915.75 cw(c724.21,-927.3) 732.71,-918.8 ; U4.6@720.85,-915.75 cw(c724.21,-927.3) 732.71,-918.8 ; U4.6@728.78,-906.74 ccw(c742.6,-908.91) 732.71,-918.8 ; U4.6@728.78,-906.74 ccw(c742.6,-908.91) 732.71,-918.8 ; U4.6@728.78,-906.74 ccw(c742.6,-908.91) 732.71,-918.8 ; U4.6@728.92,-905 ccw(c753.07,-905) 735.99,-922.08 ; U4.6@728.92,-905 ccw(c753.07,-905) 735.99,-922.08 ; U4.6@728.92,-905 ccw(c753.07,-905) 735.99,-922.08 ; 732.71,-918.8 753.92,-940.01 753.92,-971.71 878.55,-1096.35 ; 840.49,-1058.28 cw(c778.77,-1120) D19.2@866.05,-1120 ; 840.49,-1058.28 cw(c778.77,-1120) D19.2@866.05,-1120 ; 840.49,-1058.28 cw(c778.77,-1120) D19.2@866.05,-1120 ; D19.2@860.91,-1100.8 ccw(c894.9,-1091.69) D19.2@877.3,-1122.17 ; D19.2@860.91,-1100.8 ccw(c894.9,-1091.69) D19.2@877.3,-1122.17 ; D19.2@860.91,-1100.8 ccw(c894.9,-1091.69) D19.2@877.3,-1122.17 ; D19.2@860.91,-1100.8 ccw(c894.9,-1091.69) D19.2@877.3,-1122.17 ; 866.09,-1083.89 cw(c829.98,-1120) D19.2@881.05,-1120 ; 866.09,-1083.89 cw(c829.98,-1120) D19.2@881.05,-1120 ; 866.09,-1083.89 cw(c829.98,-1120) D19.2@881.05,-1120 ; D19.2@871.25,-1109.86 ccw(c865.05,-1101.25) 875.29,-1098.51 ; D19.2@871.25,-1109.86 ccw(c865.05,-1101.25) 875.29,-1098.51 ; D19.2@871.25,-1109.86 ccw(c865.05,-1101.25) 875.29,-1098.51 ; D19.2@871.51,-1109.67 ccw(c862.43,-1096.35) 878.55,-1096.35 ; D19.2@871.51,-1109.67 ccw(c862.43,-1096.35) 878.55,-1096.35 ; D19.2@871.51,-1109.67 ccw(c862.43,-1096.35) 878.55,-1096.35 ; 875.29,-1098.51 ccw(c890.44,-1094.45) D19.2@883.82,-1108.67 ; 875.29,-1098.51 ccw(c890.44,-1094.45) D19.2@883.82,-1108.67 ; 875.29,-1098.51 ccw(c890.44,-1094.45) D19.2@883.82,-1108.67 ; 878.55,-1096.35 ccw(c894.68,-1096.35) D19.2@885.59,-1109.67 ; 878.55,-1096.35 ccw(c894.68,-1096.35) D19.2@885.59,-1109.67 ; 878.55,-1096.35 ccw(c894.68,-1096.35) D19.2@885.59,-1109.67
  Top Layer w40: D19.2@878.55,-1125 878.55,-1271.34 ; 900.99,-1245.04 ccw(c940.18,-1245.04) Q7.3@922.32,-1279.92 ; Q7.3@915.48,-1308.27 878.55,-1271.34 ; 878.55,-1271.34 ccw(c900.92,-1248.97) Q7.3@910.8,-1279.02 ; 878.55,-1271.34 ccw(c900.92,-1248.97) Q7.3@910.8,-1279.02 ; 878.55,-1271.34 ccw(c900.92,-1248.97) Q7.3@910.8,-1279.02 ; 878.55,-1264.46 ccw(c944.29,-1264.46) Q7.3@897.8,-1310.95 ; 878.55,-1264.46 ccw(c944.29,-1264.46) Q7.3@897.8,-1310.95 ; 878.55,-1264.46 ccw(c944.29,-1264.46) Q7.3@897.8,-1310.95 ; 878.55,-1167.9 ccw(c1040.86,-1167.9) Q7.3@926.09,-1282.66 ; 878.55,-1167.9 ccw(c1040.86,-1167.9) Q7.3@926.09,-1282.66 ; 878.55,-1167.9 ccw(c1040.86,-1167.9) Q7.3@926.09,-1282.66
  Top Layer w80: Q8.2@672.06,-1551.69 Q7.3@915.48,-1308.27 ; Q8.2@590.37,-1560.39 ccw(c590.37,-1384.19) 714.96,-1508.79 ; Q8.2@590.37,-1560.39 ccw(c590.37,-1384.19) 714.96,-1508.79 ; Q8.2@590.37,-1560.39 ccw(c590.37,-1384.19) 714.96,-1508.79 ; Q8.2@590.37,-1480.39 ccw(c590.37,-1111.05) 851.53,-1372.22 ; Q8.2@590.37,-1480.39 ccw(c590.37,-1111.05) 851.53,-1372.22 ; Q8.2@590.37,-1480.39 ccw(c590.37,-1111.05) 851.53,-1372.22
  Bottom Layer w80: B2.2@145,-1125 v1@600,-1580
  other v1: 530.37,-1680 570.37,-1680 610.37,-1680 650.37,-1680 530.37,-1630 570.37,-1630 610.37,-1630 650.37,-1630 530.37,-1580 570.37,-1580 610.37,-1580 650.37,-1580 530.37,-1530 570.37,-1530 610.37,-1530 650.37,-1530 530.37,-1480 570.37,-1480 610.37,-1480 650.37,-1480
NetC4_1: C4.1 U1.3 | length 413.6
  Top Layer w15: U1.3@645.47,-245 780,-245 C4.1@810,-275 ; 780.13,-245.13 cw(c750.25,-275) C4.1@792.5,-275 ; 780.13,-245.13 cw(c750.25,-275) C4.1@792.5,-275 ; 780.13,-245.13 cw(c750.25,-275) C4.1@792.5,-275 ; C4.1@788.7,-260.81 ccw(c811.95,-254.58) C4.1@804.19,-277.37 ; C4.1@788.7,-260.81 ccw(c811.95,-254.58) C4.1@804.19,-277.37 ; C4.1@788.7,-260.81 ccw(c811.95,-254.58) C4.1@804.19,-277.37 ; C4.1@788.7,-260.81 ccw(c811.95,-254.58) C4.1@804.19,-277.37 ; C4.1@792.2,-257.2 ccw(c805,-244.39) C4.1@805,-262.5 ; C4.1@792.2,-257.2 ccw(c805,-244.39) C4.1@805,-262.5 ; C4.1@792.2,-257.2 ccw(c805,-244.39) C4.1@805,-262.5
NetC9_1: C9.1 D11.1 U3.8 | length 992.3
  Top Layer w15: U3.8@1567.2,-805 1730,-805 D11.1@1740,-795 1819.01,-874.01 C9.1@1819.01,-960 ; U3.8@1605.64,-812.92 cw(c1624.76,-832.04) 1624.76,-805 ; U3.8@1605.64,-812.92 cw(c1624.76,-832.04) 1624.76,-805 ; U3.8@1605.64,-812.92 cw(c1624.76,-832.04) 1624.76,-805 ; U3.8@1605.64,-797.08 ccw(c1624.76,-777.96) 1624.76,-805 ; U3.8@1605.64,-797.08 ccw(c1624.76,-777.96) 1624.76,-805 ; U3.8@1605.64,-797.08 ccw(c1624.76,-777.96) 1624.76,-805 ; 1697.75,-805 ccw(c1697.75,-757.75) D11.1@1731.16,-791.16 ; 1697.75,-805 ccw(c1697.75,-757.75) D11.1@1731.16,-791.16 ; 1697.75,-805 ccw(c1697.75,-757.75) D11.1@1731.16,-791.16 ; D11.1@1737.63,-800.81 ccw(c1760.42,-793.05) D11.1@1754.19,-816.3 ; D11.1@1737.63,-800.81 ccw(c1760.42,-793.05) D11.1@1754.19,-816.3 ; D11.1@1737.63,-800.81 ccw(c1760.42,-793.05) D11.1@1754.19,-816.3 ; D11.1@1737.63,-800.81 ccw(c1760.42,-793.05) D11.1@1754.19,-816.3 ; D11.1@1740,-812.5 cw(c1740,-854.75) 1769.87,-824.87 ; D11.1@1740,-812.5 cw(c1740,-854.75) 1769.87,-824.87 ; D11.1@1740,-812.5 cw(c1740,-854.75) 1769.87,-824.87 ; D11.1@1752.5,-800 ccw(c1770.61,-800) D11.1@1757.8,-812.8 ; D11.1@1752.5,-800 ccw(c1770.61,-800) D11.1@1757.8,-812.8 ; D11.1@1752.5,-800 ccw(c1770.61,-800) D11.1@1757.8,-812.8 ; C9.1@1810.17,-946.16 ccw(c1788.83,-924.82) 1819.01,-924.82 ; C9.1@1810.17,-946.16 ccw(c1788.83,-924.82) 1819.01,-924.82 ; C9.1@1810.17,-946.16 ccw(c1788.83,-924.82) 1819.01,-924.82 ; 1819.01,-924.82 ccw(c1849.19,-924.82) C9.1@1827.85,-946.16 ; 1819.01,-924.82 ccw(c1849.19,-924.82) C9.1@1827.85,-946.16 ; 1819.01,-924.82 ccw(c1849.19,-924.82) C9.1@1827.85,-946.16